# Altium PCB board.PcbDoc
Units mm, origin at the board's own origin, x right, y up, seen from the top; angles counter-clockwise.
Board outline 162 x 60 mm, 2 copper layers (Top Layer, Bottom Layer); 141 components, 80 nets, 396 pads, 0 vias.
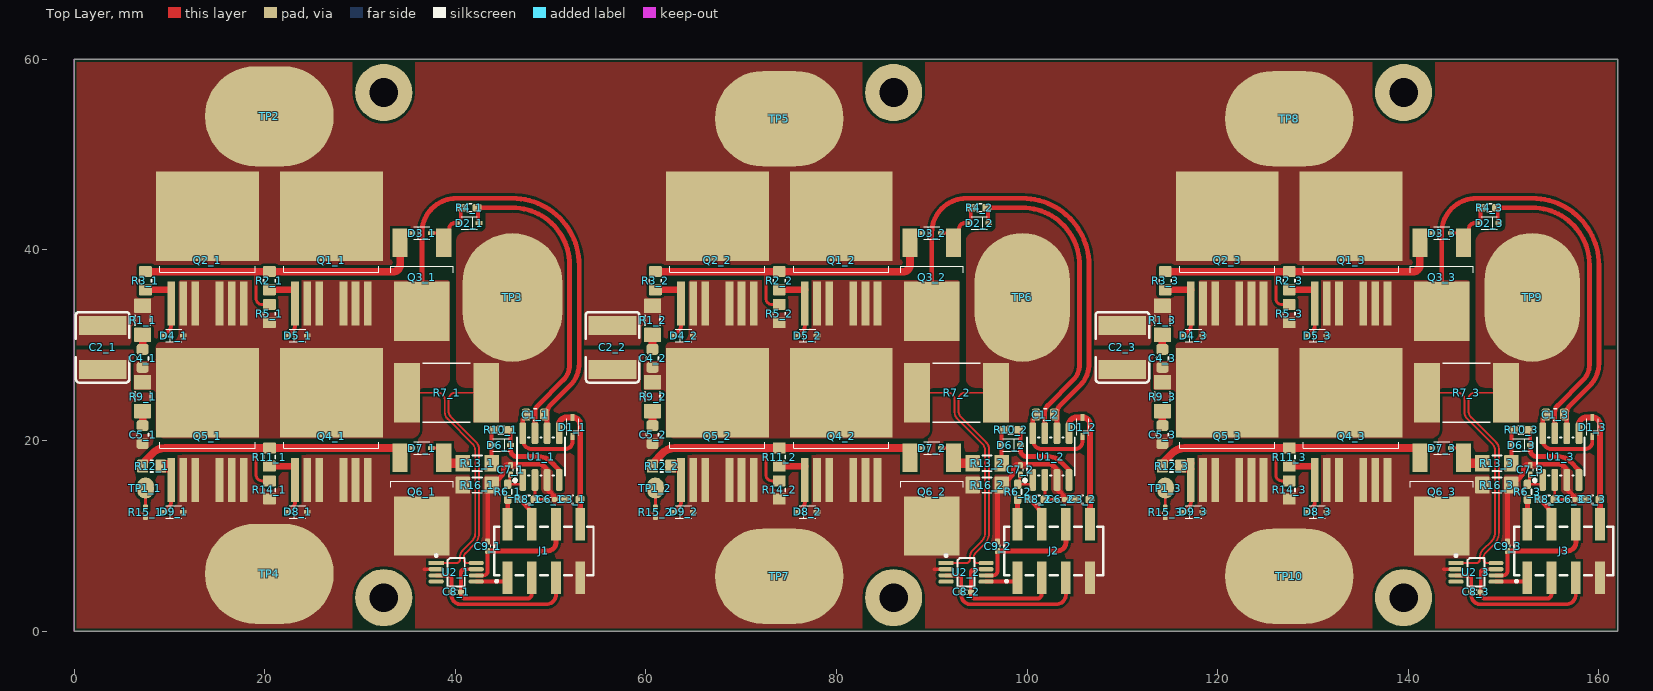
[diagram p0: Top Layer view]
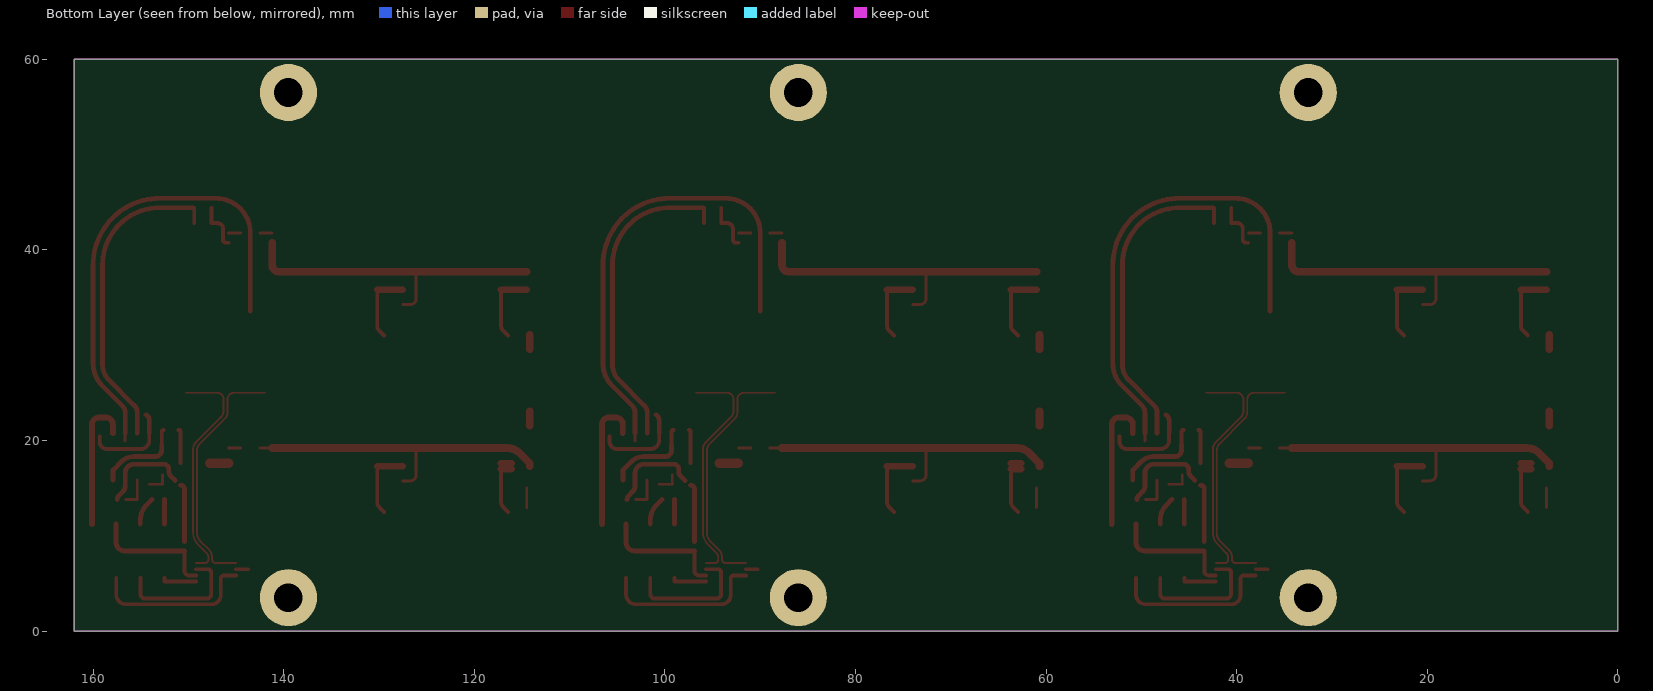
[diagram p1: Bottom Layer view, seen from below]
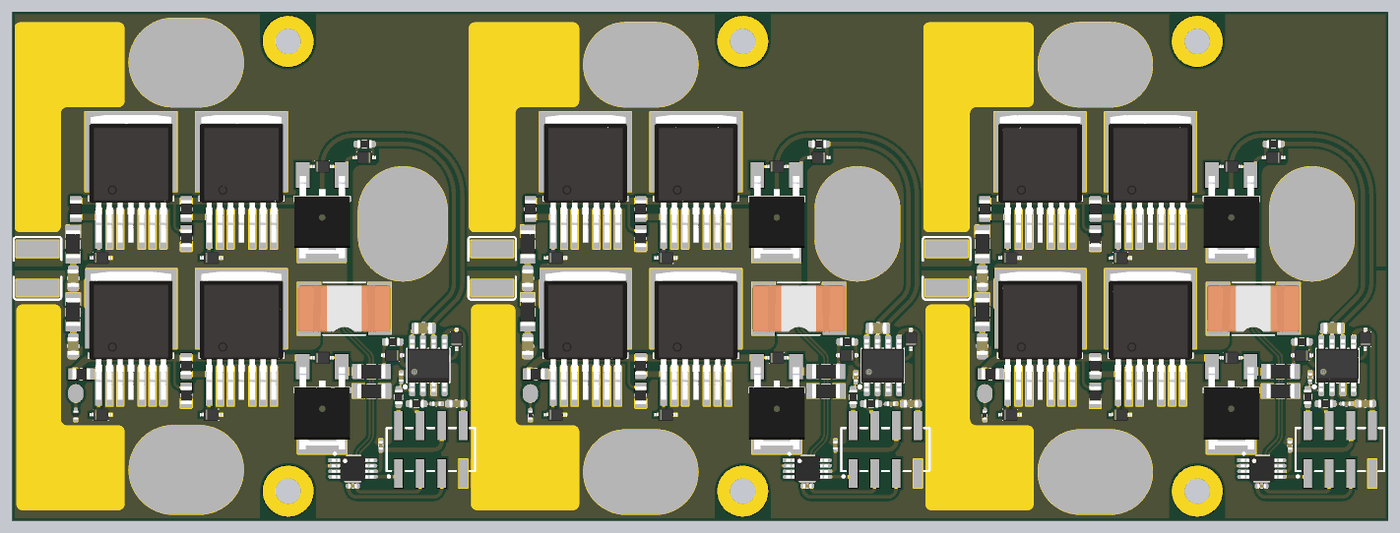
[diagram p2: 3D render of the assembled board from above, using the file's embedded part models]

## Layer stack, top to bottom
Top Solder: solder mask 0.0102, Solder Resist, Dk 3.5
Top Layer: signal copper 0.0356
Dielectric 1: dielectric 0.32, FR-4, Dk 4.8
Bottom Layer: signal copper 0.0356
Bottom Solder: solder mask 0.0102, Solder Resist, Dk 3.5

## Board outline
0,0 162,0 162,60 0,60

## Design rules (kind name [scope] priority, off if disabled: settings)
AcuteAngle [All] p1: minimum=6.00000000000000E+0001 checktracksonly=FALSE
Clearance [All] p1: gap=0.18 ignorepadtopadclearanceinfootprint=FALSE except(0.3: Arc-Fill Arc-Poly Arc-Region Track-Fill Track-Poly Track-Region SMDPad-Fill SMDPad-Poly SMDPad-Region THPad-Fill THPad-Poly THPad-Region Via-Fill Via-Poly Via-Region Fill-Fill Fill-Poly Fill-Region Poly-Poly Poly-Region Region-Region)
HoleSize [All] p1: absolutevalues=TRUE maxlimit=5 minlimit=1 maxpercent=80.000 minpercent=20.000
MinimumSolderMaskSliver [All] p1 off: minsoldermaskwidth=0.254
PermittedLayers [All] p1: toplayerpermitted=TRUE bottomlayerpermitted=FALSE
PlaneConnect [All] p1: planeconnectstyle=Direct reliefexpansion=0.508 reliefentries=4 reliefconductorwidth=0.254 reliefairgap=0.254
PolygonConnect [All] p1: connectstyle=Direct reliefconductorwidth=0.254 reliefentries=4 polygonreliefangle="90 Angle" airgapwidth=0.254
RoutingLayers [All] p1: top layer_v5=TRUE bottom layer_v5=FALSE
RoutingVias [All] p1: holewidth=0.711 width=1.27 viastyle="Through Hole" minholewidth=0.711 minwidth=1.27 maxholewidth=0.711 maxwidth=1.27
SilkToSolderMaskClearance [IsPad] p1 off: minsilkscreentomaskgap=0.254 clearancetoexposedcopper=TRUE
SolderMaskExpansion [All] p1: expansion=0.102 istentingtop=FALSE
UnRoutedNet [All] p1: checkbadconnections=TRUE
Width [All] p1: maxlimit=50 minlimit=0.2 preferedwidth=0.254
24 further rules are at their usual default settings.

## Classes and differential pairs
net class C2_3_Nets: GND VB
net class C2_2_Nets: GND VB
net class C1_1_Nets: NetC1_1_1 NetC1_1_2
net class R15_3_Nets: GND NetR15_3_1
net class R15_2_Nets: GND NetR15_2_1
net class R15_1_Nets: GND NetR15_1_1
net class R9_3_Nets: NetC1_3_2 NetC5_3_2
net class R9_2_Nets: NetC1_2_2 NetC5_2_2
net class R9_1_Nets: NetC1_1_2 NetC5_1_2
net class R8_3_Nets: NetC6_3_2 W_L
net class R8_2_Nets: NetC6_2_2 V_L
net class R8_1_Nets: NetC6_1_2 U_L
net class R1_3_Nets: NetC4_3_2 VB
net class R1_2_Nets: NetC4_2_2 VB
net class R1_1_Nets: NetC4_1_2 VB
net class C7_3_Nets: GND NetC7_3_2
net class C7_2_Nets: GND NetC7_2_2
net class C7_1_Nets: GND NetC7_1_2
net class C6_3_Nets: GND NetC6_3_2
net class C6_2_Nets: GND NetC6_2_2
net class C6_1_Nets: GND NetC6_1_2
net class TP5_Nets: VB
net class TP2_Nets: VB
net class TP1_3_Nets: NetR15_3_1
net class TP1_2_Nets: NetR15_2_1
net class TP1_1_Nets: NetR15_1_1
net class R16_3_Nets: GND
net class R16_2_Nets: GND
net class R16_1_Nets: GND
net class C9_3_Nets: GND W_5V
net class C9_2_Nets: GND V_5V
net class C9_1_Nets: GND U_5V
net class C5_3_Nets: GND NetC5_3_2
net class C5_2_Nets: GND NetC5_2_2
net class C5_1_Nets: GND NetC5_1_2
net class C2_1_Nets: GND VB
net class C1_2_Nets: NetC1_2_1 NetC1_2_2
net class C1_3_Nets: NetC1_3_1 NetC1_3_2
net class J3_Nets: GND NetJ3_1 NetJ3_2 NetJ3_3 NetJ3_4 NetJ3_5 NetJ3_6 NetJ3_7 NetJ3_8 W_5V W_H W_Iout W_L W_ref_+ W_ref_- W_Vcc
net class J2_Nets: GND NetJ2_1 NetJ2_2 NetJ2_3 NetJ2_4 NetJ2_5 NetJ2_6 NetJ2_7 NetJ2_8 V_5V V_H V_Iout V_L V_ref_+ V_ref_- V_Vcc
net class J1_Nets: GND NetJ1_1 NetJ1_2 NetJ1_3 NetJ1_4 NetJ1_5 NetJ1_6 NetJ1_7 NetJ1_8 U_5V U_H U_Iout U_L U_ref_+ U_ref_- U_Vcc
net class R14_2_Nets: GND NetD7_2_2
net class Q4_1_Nets: GND NetC1_1_2 NetD8_1_2
net class D6_1_Nets: NetD6_1_1 NetD6_1_2
net class Q5_3_Nets: GND NetC1_3_2 NetD9_3_2
net class Q5_2_Nets: GND NetC1_2_2 NetD9_2_2
net class D7_3_Nets: NetD7_3_1 NetD7_3_2
net class D7_2_Nets: NetD7_2_1 NetD7_2_2
net class TP10_Nets: GND
net class TP7_Nets: GND
net class TP9_Nets: W_OUT
net class TP8_Nets: VB
net class TP6_Nets: V_OUT
net class TP3_Nets: U_OUT
net class U2_3_Nets: GND NetC1_3_2 W_5V W_Iout W_OUT W_ref_+ W_ref_-
net class U2_2_Nets: GND NetC1_2_2 V_5V V_Iout V_OUT V_ref_+ V_ref_-
net class U2_1_Nets: GND NetC1_1_2 U_5V U_Iout U_OUT U_ref_+ U_ref_-
net class U1_3_Nets: GND NetC1_3_1 NetC1_3_2 NetC6_3_2 NetC7_3_2 NetD2_3_2 NetD6_3_2 W_Vcc
net class U1_2_Nets: GND NetC1_2_1 NetC1_2_2 NetC6_2_2 NetC7_2_2 NetD2_2_2 NetD6_2_2 V_Vcc
net class U1_1_Nets: GND NetC1_1_1 NetC1_1_2 NetC6_1_2 NetC7_1_2 NetD2_1_2 NetD6_1_2 U_Vcc
net class TP4_Nets: GND NetR12_1
net class R13_3_Nets: NetD6_3_1 NetD7_3_1
net class R13_2_Nets: NetD6_2_1 NetD7_2_1
net class R13_1_Nets: NetD6_1_1 NetD7_1_1
net class R12_3_Nets: NetD7_3_2 NetD9_3_2
net class R12_2_Nets: NetD7_2_2 NetD9_2_2
net class R12_1_Nets: NetD7_1_2 NetD9_1_2
net class R11_3_Nets: NetD7_3_2 NetD8_3_2
net class R11_2_Nets: NetD7_2_2 NetD8_2_2
net class R11_1_Nets: NetD7_1_2 NetD8_1_2
net class R10_3_Nets: NetD6_3_1 NetD6_3_2
net class R10_2_Nets: NetD6_2_1 NetD6_2_2
net class R10_1_Nets: NetD6_1_1 NetD6_1_2
net class R7_3_Nets: NetC1_3_2 W_OUT
net class R7_2_Nets: NetC1_2_2 V_OUT
net class R7_1_Nets: NetC1_1_2 U_OUT
net class R6_3_Nets: NetC7_3_2 W_H
net class R6_2_Nets: NetC7_2_2 V_H
net class R6_1_Nets: NetC7_1_2 U_H
net class R5_3_Nets: NetC1_3_2 NetD3_3_2
net class R5_2_Nets: NetC1_2_2 NetD3_2_2
net class R5_1_Nets: NetC1_1_2 NetD3_1_2
net class R4_3_Nets: NetD2_3_1 NetD2_3_2
net class R4_2_Nets: NetD2_2_1 NetD2_2_2
net class R4_1_Nets: NetD2_1_1 NetD2_1_2
net class R3_3_Nets: NetD3_3_2 NetD4_3_2
net class R3_2_Nets: NetD3_2_2 NetD4_2_2
net class R3_1_Nets: NetD3_1_2 NetD4_1_2
net class R2_3_Nets: NetD3_3_2 NetD5_3_2
net class R2_2_Nets: NetD3_2_2 NetD5_2_2
net class R2_1_Nets: NetD3_1_2 NetD5_1_2
net class Q6_3_Nets: GND NetD7_3_1 NetD7_3_2
net class Q6_2_Nets: GND NetD7_2_1 NetD7_2_2
net class Q6_1_Nets: GND NetD7_1_1 NetD7_1_2
net class Q4_3_Nets: GND NetC1_3_2 NetD8_3_2
net class Q4_2_Nets: GND NetC1_2_2 NetD8_2_2
net class Q5_1_Nets: GND NetC1_1_2 NetD9_1_2
net class Q3_3_Nets: NetC1_3_2 NetD2_3_1 NetD3_3_2
net class Q3_2_Nets: NetC1_2_2 NetD2_2_1 NetD3_2_2
net class Q3_1_Nets: NetC1_1_2 NetD2_1_1 NetD3_1_2
net class Q2_3_Nets: NetC1_3_2 NetD4_3_2 VB
net class Q2_2_Nets: NetC1_2_2 NetD4_2_2 VB
net class Q2_1_Nets: NetC1_1_2 NetD4_1_2 VB
net class Q1_3_Nets: NetC1_3_2 NetD5_3_2 VB
net class Q1_2_Nets: NetC1_2_2 NetD5_2_2 VB
net class Q1_1_Nets: NetC1_1_2 NetD5_1_2 VB
net class D9_3_Nets: GND NetD9_3_2
net class D9_2_Nets: GND NetD9_2_2
net class R14_1_Nets: GND NetD7_1_2
net class D8_3_Nets: GND NetD8_3_2
net class D8_1_Nets: GND NetD8_1_2
net class R14_3_Nets: GND NetD7_3_2
net class D8_2_Nets: GND NetD8_2_2
net class D9_1_Nets: GND NetD9_1_2
net class D6_3_Nets: NetD6_3_1 NetD6_3_2
net class D6_2_Nets: NetD6_2_1 NetD6_2_2
net class D7_1_Nets: NetD7_1_1 NetD7_1_2
net class D5_3_Nets: NetC1_3_2 NetD5_3_2
net class D5_2_Nets: NetC1_2_2 NetD5_2_2
net class D5_1_Nets: NetC1_1_2 NetD5_1_2
net class D4_3_Nets: NetC1_3_2 NetD4_3_2
net class D4_2_Nets: NetC1_2_2 NetD4_2_2
net class D4_1_Nets: NetC1_1_2 NetD4_1_2
net class D3_3_Nets: NetD2_3_1 NetD3_3_2
net class D3_2_Nets: NetD2_2_1 NetD3_2_2
net class D3_1_Nets: NetD2_1_1 NetD3_1_2
net class D2_3_Nets: NetD2_3_1 NetD2_3_2
net class D2_2_Nets: NetD2_2_1 NetD2_2_2
net class D2_1_Nets: NetD2_1_1 NetD2_1_2
net class D1_3_Nets: NetC1_3_1 W_Vcc
net class D1_2_Nets: NetC1_2_1 V_Vcc
net class D1_1_Nets: NetC1_1_1 U_Vcc
net class C8_3_Nets: W_ref_+ W_ref_-
net class C8_2_Nets: V_ref_+ V_ref_-
net class C8_1_Nets: U_ref_+ U_ref_-
net class C4_3_Nets: NetC1_3_2 NetC4_3_2
net class C4_2_Nets: NetC1_2_2 NetC4_2_2
net class C4_1_Nets: NetC1_1_2 NetC4_1_2
net class C3_3_Nets: GND W_Vcc
net class C3_2_Nets: GND V_Vcc
net class C3_1_Nets: GND U_Vcc
channel class power_phase: "Phase U" "Phase V" "Phase W"

## Components (designator, comment, footprint, x,y, rotation, side; value= is the part's Value field where it differs from the comment)
C1_1 "0.1uF" C0805_L 48.4,22.7 r0 top (schematic designator C1)
C1_2 "0.1uF" C0805_L 101.9,22.7 r0 top (schematic designator C1)
C1_3 "0.1uF" C0805_L 155.4,22.7 r0 top (schematic designator C1)
C2_1 "10uF" C2220 3,29.75 r90 top (schematic designator C2)
C2_2 "10uF" C2220 56.5,29.75 r90 top (schematic designator C2)
C2_3 "10uF" C2220 110,29.75 r90 top (schematic designator C2)
C3_1 "0.1uF" C0603 52.3,13.8 r0 top (schematic designator C3)
C3_2 "0.1uF" C0603 105.8,13.8 r0 top (schematic designator C3)
C3_3 "0.1uF" C0603 159.3,13.8 r0 top (schematic designator C3)
C4_1 "33nF" C0805 7.2,28.6 r90 top (schematic designator C4)
C4_2 "33nF" C0805 60.7,28.6 r90 top (schematic designator C4)
C4_3 "33nF" C0805 114.2,28.6 r90 top (schematic designator C4)
C5_1 "33nF" C0805 7.2,20.6 r90 top (schematic designator C5)
C5_2 "33nF" C0805 60.7,20.6 r90 top (schematic designator C5)
C5_3 "33nF" C0805 114.2,20.6 r90 top (schematic designator C5)
C6_1 "100pF" C0402 49.965,13.8 r180 top (schematic designator C6)
C6_2 "100pF" C0402 103.465,13.8 r180 top (schematic designator C6)
C6_3 "100pF" C0402 157.065,13.8 r180 top (schematic designator C6)
C7_1 "100pF" C0402 45.8,16.9 r270 top (schematic designator C7)
C7_2 "100pF" C0402 99.3,16.9 r270 top (schematic designator C7)
C7_3 "100pF" C0402 152.8,16.9 r270 top (schematic designator C7)
C8_1 "0.1uF" C0402 40.1,4.1 r0 top (schematic designator C8)
C8_2 "0.1uF" C0402 93.6,4.1 r0 top (schematic designator C8)
C8_3 "0.1uF" C0402 147.1,4.1 r0 top (schematic designator C8)
C9_1 "0.1uF" C0402 43.4,8.9 r270 top (schematic designator C9)
C9_2 "0.1uF" C0402 96.9,8.9 r270 top (schematic designator C9)
C9_3 "0.1uF" C0402 150.41,8.9 r270 top (schematic designator C9)
D1_1 "" SOD-323 52.3,21.4 r90 top (schematic designator D1)
D1_2 "" SOD-323 105.8,21.4 r90 top (schematic designator D1)
D1_3 "" SOD-323 159.3,21.4 r90 top (schematic designator D1)
D2_1 "B0530WS" SOD-323 41.486,42.8 r180 top (schematic designator D2)
D2_2 "B0530WS" SOD-323 94.986,42.8 r180 top (schematic designator D2)
D2_3 "B0530WS" SOD-323 148.486,42.8 r180 top (schematic designator D2)
D3_1 "B0530WS" SOD-323 36.5,41.75 r0 top (schematic designator D3)
D3_2 "B0530WS" SOD-323 90,41.75 r0 top (schematic designator D3)
D3_3 "B0530WS" SOD-323 143.5,41.75 r0 top (schematic designator D3)
D4_1 "B0530WS" SOD-323 10.46,31 r0 top (schematic designator D4)
D4_2 "B0530WS" SOD-323 63.96,31 r0 top (schematic designator D4)
D4_3 "B0530WS" SOD-323 117.46,31 r0 top (schematic designator D4)
D5_1 "B0530WS" SOD-323 23.46,31 r0 top (schematic designator D5)
D5_2 "B0530WS" SOD-323 76.96,31 r0 top (schematic designator D5)
D5_3 "B0530WS" SOD-323 130.46,31 r0 top (schematic designator D5)
D6_1 "B0530WS" SOD-323 44.8,19.5 r180 top (schematic designator D6)
D6_2 "B0530WS" SOD-323 98.3,19.5 r180 top (schematic designator D6)
D6_3 "B0530WS" SOD-323 151.824,19.5 r180 top (schematic designator D6)
D7_1 "B0530WS" SOD-323 36.5,19.2 r0 top (schematic designator D7)
D7_2 "B0530WS" SOD-323 90,19.2 r0 top (schematic designator D7)
D7_3 "B0530WS" SOD-323 143.5,19.2 r0 top (schematic designator D7)
D8_1 "B0530WS" SOD-323 23.46,12.5 r0 top (schematic designator D8)
D8_2 "B0530WS" SOD-323 76.96,12.5 r0 top (schematic designator D8)
D8_3 "B0530WS" SOD-323 130.46,12.5 r0 top (schematic designator D8)
D9_1 "B0530WS" SOD-323 10.46,12.5 r0 top (schematic designator D9)
D9_2 "B0530WS" SOD-323 63.96,12.5 r0 top (schematic designator D9)
D9_3 "B0530WS" SOD-323 117.46,12.5 r0 top (schematic designator D9)
J1 "2x4" HDR-SMD_8P-P2.54-V-M-R2-C4-LS8.0 49.3,8.4 r0 top
J2 "2x4" HDR-SMD_8P-P2.54-V-M-R2-C4-LS8.0 102.8,8.4 r0 top
J3 "2x4" HDR-SMD_8P-P2.54-V-M-R2-C4-LS8.0 156.3,8.4 r0 top
Q1_1 "IPB036N12N3" TO-263-7 27,43.5 r0 top (schematic designator Q1)
Q1_2 "IPB036N12N3" TO-263-7 80.5,43.5 r0 top (schematic designator Q1)
Q1_3 "IPB036N12N3" TO-263-7 134,43.5 r0 top (schematic designator Q1)
Q2_1 "IPB036N12N3" TO-263-7 14,43.5 r0 top (schematic designator Q2)
Q2_2 "IPB036N12N3" TO-263-7 67.5,43.5 r0 top (schematic designator Q2)
Q2_3 "IPB036N12N3" TO-263-7 121,43.5 r0 top (schematic designator Q2)
Q3_1 "MJD45H11" TO-252AA 36.5,33.55 r180 top (schematic designator Q3)
Q3_2 "MJD45H11" TO-252AA 90,33.55 r180 top (schematic designator Q3)
Q3_3 "MJD45H11" TO-252AA 143.5,33.55 r180 top (schematic designator Q3)
Q4_1 "IPB036N12N3" TO-263-7 27,25 r0 top (schematic designator Q4)
Q4_2 "IPB036N12N3" TO-263-7 80.5,25 r0 top (schematic designator Q4)
Q4_3 "IPB036N12N3" TO-263-7 134,25 r0 top (schematic designator Q4)
Q5_1 "IPB036N12N3" TO-263-7 14,25 r0 top (schematic designator Q5)
Q5_2 "IPB036N12N3" TO-263-7 67.5,25 r0 top (schematic designator Q5)
Q5_3 "IPB036N12N3" TO-263-7 121,25 r0 top (schematic designator Q5)
Q6_1 "MJD45H11" TO-252AA 36.5,11 r180 top (schematic designator Q6)
Q6_2 "MJD45H11" TO-252AA 90,11 r180 top (schematic designator Q6)
Q6_3 "MJD45H11" TO-252AA 143.5,11 r180 top (schematic designator Q6)
R1_1 "1" R1206 7.2,32.6 r90 top (schematic designator R1)
R1_2 "1" R1206 60.7,32.6 r90 top (schematic designator R1)
R1_3 "1" R1206 114.2,32.6 r90 top (schematic designator R1)
R2_1 "8.2" R0805 20.5,36.748 r270 top (schematic designator R2)
R2_2 "8.2" R0805 74,36.748 r270 top (schematic designator R2)
R2_3 "8.2" R0805 127.5,36.748 r270 top (schematic designator R2)
R3_1 "8.2" R0805 7.5,36.748 r270 top (schematic designator R3)
R3_2 "8.2" R0805 61,36.748 r270 top (schematic designator R3)
R3_3 "8.2" R0805 114.5,36.748 r270 top (schematic designator R3)
R4_1 "24" R0603 41.486,44.412 r0 top (schematic designator R4)
R4_2 "24" R0603 94.986,44.412 r0 top (schematic designator R4)
R4_3 "24" R0603 148.486,44.412 r0 top (schematic designator R4)
R5_1 "100k" R0805 20.5,33.3 r270 top (schematic designator R5)
R5_2 "100k" R0805 74,33.3 r270 top (schematic designator R5)
R5_3 "100k" R0805 127.5,33.3 r270 top (schematic designator R5)
R6_1 "2k" R0603 45.5,14.6 r270 top (schematic designator R6)
R6_2 "2k" R0603 99,14.6 r270 top (schematic designator R6)
R6_3 "2k" R0603 152.5,14.6 r270 top (schematic designator R6)
R7_1 "1mR" RES_CSS2H-3920R 39.1,25 r0 top (schematic designator R7)
R7_2 "1mR" RES_CSS2H-3920R 92.6,25 r0 top (schematic designator R7)
R7_3 "1mR" RES_CSS2H-3920R 146.1,25 r0 top (schematic designator R7)
R8_1 "2k" R0603 47.6,13.8 r180 top (schematic designator R8)
R8_2 "2k" R0603 101.1,13.8 r180 top (schematic designator R8)
R8_3 "2k" R0603 154.61,13.8 r180 top (schematic designator R8)
R9_1 "1" R1206 7.2,24.6 r90 top (schematic designator R9)
R9_2 "1" R1206 60.7,24.6 r90 top (schematic designator R9)
R9_3 "1" R1206 114.2,24.6 r90 top (schematic designator R9)
R10_1 "24" R0603 44.8,21.1 r0 top (schematic designator R10)
R10_2 "24" R0603 98.3,21.1 r0 top (schematic designator R10)
R10_3 "24" R0603 151.823,21.1 r0 top (schematic designator R10)
R11_1 "8.2" R0805 20.5,18.247 r270 top (schematic designator R11)
R11_2 "8.2" R0805 74,18.247 r270 top (schematic designator R11)
R11_3 "8.2" R0805 127.5,18.247 r270 top (schematic designator R11)
R12_1 "8.2" R0805 8.153,17.295 r0 top (schematic designator R12)
R12_2 "8.2" R0805 61.653,17.295 r0 top (schematic designator R12)
R12_3 "8.2" R0805 115.153,17.295 r0 top (schematic designator R12)
R13_1 "0" R1206 42.3,17.6 r0 top (schematic designator R13)
R13_2 "0" R1206 95.8,17.6 r0 top (schematic designator R13)
R13_3 "0" R1206 149.3,17.6 r0 top (schematic designator R13)
R14_1 "100k" R0805 20.5,14.8 r270 top (schematic designator R14)
R14_2 "100k" R0805 74,14.8 r270 top (schematic designator R14)
R14_3 "100k" R0805 127.5,14.8 r270 top (schematic designator R14)
R15_1 "10k NTC" R0402 7.5,12.45 r270 top (schematic designator R15)
R15_2 "10k NTC" R0402 61,12.45 r270 top (schematic designator R15)
R15_3 "10k NTC" R0402 114.5,12.45 r270 top (schematic designator R15)
R16_1 "0" R1206 42.3,15.3 r0 top (schematic designator R16)
R16_2 "0" R1206 95.8,15.3 r0 top (schematic designator R16)
R16_3 "0" R1206 149.3,15.3 r0 top (schematic designator R16)
TP1_1 "" TP2030_SMD#1 7.5,15 r180 top (schematic designator TP1)
TP1_2 "" TP2030_SMD#1 61,15 r180 top (schematic designator TP1)
TP1_3 "" TP2030_SMD#2 114.4,13.1 r180 top (schematic designator TP1)
TP2 "" TP2030_SMD#3 20.5,54 r180 top
TP3 "" TP2030_SMD#4 46,35 r180 top
TP4 "" TP2030_SMD#3 20.5,6 r180 top
TP5 "" TP2030_SMD#5 74,53.75 r180 top
TP6 "" TP2030_SMD#5 99.5,35 r270 top
TP7 "" TP2030_SMD#5 74,5.75 r180 top
TP8 "" TP2030_SMD#5 127.5,53.75 r180 top
TP9 "" TP2030_SMD#6 152.6,35 r90 top
TP10 "" TP2030_SMD#5 127.5,5.75 r180 top
U1_1 "IRS2186" SO-8 49,18.3 r0 top (schematic designator U1)
U1_2 "IRS2186" SO-8 102.5,18.3 r0 top (schematic designator U1)
U1_3 "IRS2186" SO-8 156,18.3 r0 top (schematic designator U1)
U2_1 "AD8418BRMZ" MSOP8 40.1,6.159 r270 top (schematic designator U2)
U2_2 "AD8418BRMZ" MSOP8 93.6,6.159 r270 top (schematic designator U2)
U2_3 "AD8418BRMZ" MSOP8 147.1,6.159 r270 top (schematic designator U2)

## Footprints (in the part's own frame and the unit in brackets; to place one, negate y for a bottom-side part, rotate by r counter-clockwise, add the part's x,y. Pads: shape width x height; smd on the part's side, far side on the other; paste and mask are expansions set on the pad)
C0402 [mm] "Chip Capacitor Body"
  rrect50% 0.635x0.508 smd mask+0.05: 1(-0.5,0) 2(0.5,0)
  silkscreen extent -0.13,-0.25 0.13,0.25, body extent -0.52,-0.27 0.53,0.28, height 0.55
C0603 [mil] "Chip Capacitor"
  rrect50% 38x31 smd mask+1.97: 1(-31.5,0) 2(31.5,0)
  silkscreen extent -3,-17 3,17, body extent -33,-18 33,18, height 35
C0805 [mil] "Chip Capacitor"
  rrect50% 45x50 smd mask+1.97: 1(-37.5,0) 2(37.5,0)
  silkscreen extent -6,-25 6,25, body extent -41,-27 41,27, height 53
C0805_L [mm] "Chip Capacitor"
  rrect50% 0.91x1.27 smd mask+0.05: 1(-0.953,0) 2(0.953,0)
  silkscreen extent -0.15,-0.63 0.15,0.63, body extent -1.05,-0.68 1.05,0.67, height 1.35
C2220 [mm]
  rect 2x5 smd: 1(-2.3,0) 2(2.3,0)
  silkscreen extent -3.7,-2.8 3.7,2.8
HDR-SMD_8P-P2.54-V-M-R2-C4-LS8.0 [mm]
  rect 1.02x3.4 smd: 1(-3.81,-2.82) 2(-3.81,2.82) 3(-1.27,-2.82) 4(-1.27,2.82) 5(1.27,-2.82) 6(1.27,2.82) 7(3.81,-2.82) 8(3.81,2.82)
  silkscreen extent -5.21,-3.3 5.21,2.54
MSOP8 [mm] "MSOP, 8-Leads"
  rect 0.45x1.6 smd mask+0.05: 1(-0.975,-2.1)
  oval 0.45x1.6 smd mask+0.05: 2(-0.325,-2.1) 3(0.325,-2.1) 4(0.975,-2.1) 5(0.975,2.1) 6(0.325,2.1) 7(-0.325,2.1) 8(-0.975,2.1)
  silkscreen extent -1.87,-2.23 1.5,0.9, body extent -1.5,-2.46 1.5,2.46, height 1.1
R0402 [mil]
  rrect50% 25x20 smd mask+1.97: 1(-19.68,0) 2(19.69,0)
  silkscreen extent -5,-10 5,10, body extent -21,-11 21,11, height 16
R0603 [mil] "Chip Resistor; Body 1.6 x 0.8 mm (LxW typ)"
  rrect50% 38x31 smd mask+1.97: 1(-31.5,0) 2(31.5,0)
  silkscreen extent -10,-17 10,17, body extent -33,-18 33,18, height 22
R0805 [mil] "Chip Resistor; Body 1.6 x 0.8 mm (LxW typ)"
  rrect15% 45x53.15 smd: 1(-37.5,0) 2(37.5,0)
  silkscreen extent -6,-25 6,25, body extent -41,-27 41,27, height 24
R1206 [mil] "Chip Resistor"
  rrect10% 60x70 smd mask+1.97: 1(-60,0) 2(60,0)
  silkscreen extent -20,-31 20,31, body extent -65,-33 65,33, height 26
RES_CSS2H-3920R [mm]
  rect 2.7x6.2 smd: 1(-4.15,0) 2(4.15,0)
  silkscreen extent -2.5,-3.1 2.5,3.1, body extent -5.46,-2.76 5.46,2.76, height 1.98
SO-8 [mm] "SOIC, 8-Leads, Body 4.9x3.9mm, Pitch 1.27mm, IPC Low Density"
  rrect50% 0.7x2.3 smd mask+0.05: 1(-1.905,-2.45) 2(-0.635,-2.45) 3(0.635,-2.45) 4(1.905,-2.45) 5(1.905,2.45) 6(0.635,2.45) 7(-0.635,2.45) 8(-1.905,2.45)
  silkscreen extent -2.77,-2.55 2.5,2, body extent -2.5,-3.1 2.5,3.1, height 1.75
SOD-323 [mm]
  rect 0.701x0.403 smd mask+0.05: 1(1,0)
  rect 0.703x0.401 smd mask+0.05: 2(-1,0)
  silkscreen extent -0.85,-0.65 0.85,0.65, body extent -1.35,-0.72 1.35,0.72, height 1.1
TO-252AA [mm] "D-PAK"
  rect 1.6x3 smd: 1(-2.286,-7.18) 3(2.286,-7.18)
  rect 5.8x6.2 smd: 2(0,0)
  silkscreen extent -3.3,-4.7 3.28,-4.06, body extent -3.3,-7.1 3.28,2.6, height 2.3
TO-263-7 [mm]
  rect 0.8x4.6 smd: 1(-3.81,-9.15) 2(-2.54,-9.15) 3(-1.27,-9.15) 5(1.27,-9.15) 6(2.54,-9.15) 7(3.81,-9.15)
  rect 10.8x9.4 smd: 4(0,0)
  silkscreen extent -5,-5.84 5,-5.21, body extent -4.91,-10.71 4.91,4.34, height 4.22
TP2030_SMD#1 [mm] "TP30_SMD"
  oval 1.8x2.2 smd mask+0.05: 1(0,0)
TP2030_SMD#2 [mm] "TP30_SMD"
  oval 1.8x2.2 smd mask+0.05: 1(-0.1,-1.9)
TP2030_SMD#3 [mm] "TP30_SMD"
  oval 13.5x10.5 smd mask+0.05: 1(0,0)
TP2030_SMD#4 [mm] "TP30_SMD"
  oval 10.5x13.5 smd mask+0.05: 1(0,0)
TP2030_SMD#5 [mm] "TP30_SMD"
  oval 13.5x10 smd mask+0.05: 1(0,0)
TP2030_SMD#6 [mm] "TP30_SMD"
  oval 13.5x10 smd mask+0.05: 1(0,-0.4)

## Part data
C1_1 C1_2 C1_3 C3_1 C3_2 C3_3 C8_1 C8_2 C8_3 C9_1 C9_2 C9_3: library part CAP, "0.1uF 50V 0603"
C2_1 C2_2 C2_3: library part CAP, "10uF 100V 2220"
C4_1 C4_2 C4_3 C5_1 C5_2 C5_3: library part CAP, "33nF 100V 1206"
C6_1 C6_2 C6_3 C7_1 C7_2 C7_3: library part CAP, "100pF 50V 0402"
D1_1 D1_2 D1_3: library part "Diode 10TQ035_1", "100V SOD-323"
D2_1 D2_2 D2_3 D3_1 D3_2 D3_3 D4_1 D4_2 D4_3 D5_1 D5_2 D5_3 D6_1 D6_2 D6_3 D7_1 D7_2 D7_3 D8_1 D8_2 D8_3 D9_1 D9_2 D9_3: library part "Diode 10TQ035_1", "Schottky 0.5A 30V SOD-323"
J1 J2 J3: library part "Header 8", "2x4 2.54mm PH-00668"
Q1_1 Q1_2 Q1_3 Q2_1 Q2_2 Q2_3 Q4_1 Q4_2 Q4_3 Q5_1 Q5_2 Q5_3: library part NMOS-2, "IPB036N12N3GATMA1"
Q3_1 Q3_2 Q3_3 Q6_1 Q6_2 Q6_3: library part PNP, "PNP Bipolar Transistor"
R1_1 R1_2 R1_3 R9_1 R9_2 R9_3: library part Res1, "1R 5% 1206"
R2_1 R2_2 R2_3 R3_1 R3_2 R3_3 R11_1 R11_2 R11_3 R12_1 R12_2 R12_3: library part Res1, "8.2R 5% 0805"
R4_1 R4_2 R4_3 R10_1 R10_2 R10_3: library part Res1, "24R 5% 0603"
R5_1 R5_2 R5_3 R14_1 R14_2 R14_3: library part Res1, "100k 5% 0805"
R6_1 R6_2 R6_3 R8_1 R8_2 R8_3: library part Res1, "2k 5% 0603"
R7_1 R7_2 R7_3: library part Res1, "1mR 3920R"
R13_1 R13_2 R13_3 R16_1 R16_2 R16_3: library part Res1, "0 2512"
R15_1 R15_2 R15_3: library part RES, "10k NTC 3434 0402"
TP1_1 TP1_2 TP1_3 TP2 TP3 TP4 TP5 TP6 TP7 TP8 TP9 TP10: library part TP_Dup1
U1_1 U1_2 U1_3: "IR2186"
U2_1 U2_2 U2_3: "Bidirectional, Zero Drift, Current Sense Amplifier"

## Free pads (board coordinates)
  round 6 hole 3 unplated: M(32.5,3.5) M(32.5,56.5) M(86,3.5) M(86,56.5) M(139.5,3.5) M(139.5,56.5)

## Nets (pads, with @x,y where several pads share a name; then routed paths per layer and width w, separated by ;. In a path a pad name is that pad's centre, name@x,y a point inside that pad or via, vN(x,y) a via of type N, cw(c..) or ccw(c..) an arc to the next point about the centre after c; other vN are vias at no path point)
GND: C2_1.1 C2_2.1 C2_3.1 C3_1.1 C3_2.1 C3_3.1 C5_1.1 C5_2.1 C5_3.1 C6_1.1 C6_2.1 C6_3.1 C7_1.1 C7_2.1 C7_3.1 C9_1.1 C9_2.1 C9_3.1 D8_1.1 D8_2.1 D8_3.1 D9_1.1 D9_2.1 D9_3.1 J1.7 J2.7 J3.7 Q4_1.2 Q4_1.3 Q4_1.5 Q4_1.6 Q4_1.7 Q4_2.2 Q4_2.3 Q4_2.5 Q4_2.6 Q4_2.7 Q4_3.2 Q4_3.3 Q4_3.5 Q4_3.6 Q4_3.7 Q5_1.2 Q5_1.3 Q5_1.5 Q5_1.6 Q5_1.7 Q5_2.2 Q5_2.3 Q5_2.5 Q5_2.6 Q5_2.7 Q5_3.2 Q5_3.3 Q5_3.5 Q5_3.6 Q5_3.7 Q6_1.2 Q6_2.2 Q6_3.2 R14_1.2 R14_2.2 R14_3.2 R15_1.2 R15_2.2 R15_3.2 R16_1.1 R16_1.2 R16_2.1 R16_2.2 R16_3.1 R16_3.2 TP4.1 TP7.1 TP10.1 U1_1.3 U1_2.3 U1_3.3 U2_1.2 U2_2.2 U2_3.2 | length 54
  Top Layer w0.4: 36.756,6.484 U2_1.2 ; 90.256,6.484 U2_2.2 ; 143.756,6.484 U2_3.2
  Top Layer w0.5: C9_1.1 43.4,14.876 cw(c43.824,14.876) R16_1.2 ; R16_1.2@44.4,15.8 44.834,16.234 ccw(c44.313,16.754) 45.049,16.754 45.049,16.975 cw(c45.575,16.975) 45.575,17.5 48.704,17.5 cw(c48.704,16.569) U1_1.3@49.635,16.569 ; C6_1.1 ccw(c49.898,13.8) 50.299,14.201 49.851,14.649 cw(c50.372,15.17) 49.635,15.17 U1_1.3 ; C9_2.1 96.9,14.876 cw(c97.324,14.876) R16_2.2 ; R16_2.2@97.9,15.8 98.334,16.234 ccw(c97.813,16.754) 98.549,16.754 98.549,16.975 cw(c99.075,16.975) 99.075,17.5 102.204,17.5 cw(c102.204,16.569) U1_2.3@103.135,16.569 ; C6_2.1 ccw(c103.398,13.8) 103.799,14.201 103.351,14.649 cw(c103.872,15.17) 103.135,15.17 U1_2.3 ; C9_3.1@150.4,9.4 150.4,14.876 cw(c150.824,14.876) R16_3.2 ; R16_3.2@151.4,15.8 151.834,16.234 ccw(c151.313,16.754) 152.049,16.754 152.049,16.975 cw(c152.575,16.975) 152.575,17.5 155.704,17.5 cw(c155.704,16.569) U1_3.3@156.635,16.569 ; C6_3.1@157.465,13.8 ccw(c156.898,13.8) 157.299,14.201 156.851,14.649 cw(c157.372,15.17) 156.635,15.17 U1_3.3 ; U1_1.3 U1_1.3@49.635,16.569 ; U1_1.3 U1_1.3@49.635,16.569 ; U1_2.3 U1_2.3@103.135,16.569 ; U1_2.3 U1_2.3@103.135,16.569 ; U1_3.3 U1_3.3@156.635,16.569 ; U1_3.3 U1_3.3@156.635,16.569
NetC1_1_1: C1_1.1 D1_1.2 U1_1.8 | length 9.5
  Top Layer w0.4: U1_1.8 47.095,20.031 ccw(c48.026,20.031) 48.026,19.1 51.563,19.1 ccw(c51.563,19.837) 52.3,19.837 D1_1.2
  Top Layer w0.5: U1_1.8 47.095,22.086 cw(c47.806,22.086) C1_1.1
NetC1_1_2: C1_1.2 C4_1.1 D4_1.1 D5_1.1 Q1_1.2 Q1_1.3 Q1_1.5 Q1_1.6 Q1_1.7 Q2_1.2 Q2_1.3 Q2_1.5 Q2_1.6 Q2_1.7 Q3_1.2 Q4_1.4 Q5_1.4 R5_1.2 R7_1.1 R9_1.2 U1_1.6 U2_1.1 | length 106.9
  Top Layer w0.2: R7_1.1 38.189,25 cw(c38.189,24.289) 38.9,24.289 38.9,22.954 ccw(c39.891,22.954) 39.19,22.253 41.81,19.633 cw(c41.11,18.933) 42.1,18.933 42.1,10.305 cw(c40.863,10.305) 41.738,9.43 40.832,8.524 ccw(c41.633,7.723) 40.5,7.723 40.5,7.49 cw(c40.144,7.49) 40.144,7.134 U2_1.1
  Top Layer w0.3: U1_1.6@49.635,19.937 U1_1.6
  Top Layer w0.5: U1_1.6 49.635,22.925 cw(c50.626,22.925) 49.924,23.624 52.028,25.728 ccw(c49.682,28.074) 53,28.074 53,38.4 ; 36.5,41.773 cw(c40.127,41.773) 40.127,45.4 ; 36.5,41.773 cw(c40.127,41.773) 40.127,45.4 ; 36.5,41.773 Q3_1.2 36.5,41.773 ; 40.127,45.4 46,45.4 ; 40.127,45.4 46,45.4 ; 46,45.4 cw(c46,38.4) 53,38.4 ; 46,45.4 cw(c46,38.4) 53,38.4
NetC1_2_1: C1_2.1 D1_2.2 U1_2.8 | length 9.5
  Top Layer w0.4: U1_2.8 100.595,20.031 ccw(c101.526,20.031) 101.526,19.1 105.063,19.1 ccw(c105.063,19.837) 105.8,19.837 D1_2.2
  Top Layer w0.5: U1_2.8 100.595,22.086 cw(c101.306,22.086) C1_2.1
NetC1_2_2: C1_2.2 C4_2.1 D4_2.1 D5_2.1 Q1_2.2 Q1_2.3 Q1_2.5 Q1_2.6 Q1_2.7 Q2_2.2 Q2_2.3 Q2_2.5 Q2_2.6 Q2_2.7 Q3_2.2 Q4_2.4 Q5_2.4 R5_2.2 R7_2.1 R9_2.2 U1_2.6 U2_2.1 | length 106.9
  Top Layer w0.2: R7_2.1 91.689,25 cw(c91.689,24.289) 92.4,24.289 92.4,22.954 ccw(c93.391,22.954) 92.69,22.253 95.31,19.633 cw(c94.61,18.933) 95.6,18.933 95.6,10.305 cw(c94.363,10.305) 95.238,9.43 94.332,8.524 ccw(c95.133,7.723) 94,7.723 94,7.49 cw(c93.644,7.49) 93.644,7.134 U2_2.1
  Top Layer w0.3: U1_2.6@103.135,19.937 U1_2.6
  Top Layer w0.5: U1_2.6 103.135,22.925 cw(c104.126,22.925) 103.424,23.624 105.528,25.728 ccw(c103.182,28.074) 106.5,28.074 106.5,38.4 ; 90,41.773 cw(c93.627,41.773) 93.627,45.4 99.5,45.4 ; 90,41.773 cw(c93.627,41.773) 93.627,45.4 99.5,45.4 ; 90,41.773 Q3_2.2 90,41.773 ; 99.5,45.4 cw(c99.5,38.4) 106.5,38.4 ; 99.5,45.4 cw(c99.5,38.4) 106.5,38.4
NetC1_3_1: C1_3.1 D1_3.2 U1_3.8 | length 9.5
  Top Layer w0.4: U1_3.8 154.095,20.031 ccw(c155.026,20.031) 155.026,19.1 158.563,19.1 ccw(c158.563,19.837) 159.3,19.837 D1_3.2
  Top Layer w0.5: U1_3.8 154.095,22.086 cw(c154.806,22.086) C1_3.1
NetC1_3_2: C1_3.2 C4_3.1 D4_3.1 D5_3.1 Q1_3.2 Q1_3.3 Q1_3.5 Q1_3.6 Q1_3.7 Q2_3.2 Q2_3.3 Q2_3.5 Q2_3.6 Q2_3.7 Q3_3.2 Q4_3.4 Q5_3.4 R5_3.2 R7_3.1 R9_3.2 U1_3.6 U2_3.1 | length 106.9
  Top Layer w0.2: R7_3.1 145.189,25 cw(c145.189,24.289) 145.9,24.289 145.9,22.954 ccw(c146.891,22.954) 146.19,22.253 148.81,19.633 cw(c148.11,18.933) 149.1,18.933 149.1,10.305 cw(c147.863,10.305) 148.738,9.43 147.832,8.524 ccw(c148.633,7.723) 147.5,7.723 147.5,7.49 cw(c147.144,7.49) 147.144,7.134 U2_3.1
  Top Layer w0.3: U1_3.6@156.635,19.937 U1_3.6
  Top Layer w0.5: U1_3.6 156.635,22.925 cw(c157.626,22.925) 156.924,23.624 159.028,25.728 ccw(c156.682,28.074) 160,28.074 160,38.4 ; 143.5,41.773 cw(c147.127,41.773) 147.127,45.4 ; 143.5,41.773 cw(c147.127,41.773) 147.127,45.4 ; 143.5,41.773 Q3_3.2 143.5,41.773 ; 147.127,45.4 153,45.4 ; 147.127,45.4 153,45.4 ; 153,45.4 cw(c153,38.4) 160,38.4 ; 153,45.4 cw(c153,38.4) 160,38.4
NetC4_1_2: C4_1.2 R1_1.1 | length 1.5
  Top Layer w0.8: C4_1.2 R1_1.1
NetC4_2_2: C4_2.2 R1_2.1 | length 1.5
  Top Layer w0.8: C4_2.2 R1_2.1
NetC4_3_2: C4_3.2 R1_3.1 | length 1.5
  Top Layer w0.8: C4_3.2 R1_3.1
NetC5_1_2: C5_1.2 R9_1.1 | length 1.5
  Top Layer w0.8: C5_1.2 R9_1.1
NetC5_2_2: C5_2.2 R9_2.1 | length 1.5
  Top Layer w0.8: C5_2.2 R9_2.1
NetC5_3_2: C5_3.2 R9_3.1 | length 1.5
  Top Layer w0.8: C5_3.2 R9_3.1
NetC6_1_2: C6_1.2 R8_1.1 U1_1.2 | length 3.2
  Top Layer w0.3: R8_1.1@48.365,13.8 U1_1.2 ; R8_1.1 C6_1.2 C6_1.2@49.565,13.8
NetC6_2_2: C6_2.2 R8_2.1 U1_2.2 | length 3.2
  Top Layer w0.3: R8_2.1@101.865,13.8 U1_2.2 ; R8_2.1 C6_2.2 C6_2.2@103.065,13.8
NetC6_3_2: C6_3.2 R8_3.1 U1_3.2 | length 3.2
  Top Layer w0.3: R8_3.1@155.365,13.8 U1_3.2 ; R8_3.1@155.4,13.8 156.465,13.8 C6_3.2
NetC7_1_2: C7_1.2 R6_1.1 U1_1.1 | length 2.3
  Top Layer w0.3: R6_1.1@45.7,15.4 U1_1.1@47.1,15.4 ; R6_1.1@45.725,15.5 C7_1.2@45.725,16.4
NetC7_2_2: C7_2.2 R6_2.1 U1_2.1 | length 2.3
  Top Layer w0.3: R6_2.1@99.2,15.4 U1_2.1@100.6,15.4 ; R6_2.1@99.225,15.5 C7_2.2@99.225,16.4
NetC7_3_2: C7_3.2 R6_3.1 U1_3.1 | length 2.3
  Top Layer w0.3: R6_3.1@152.7,15.4 U1_3.1@154.1,15.4 ; R6_3.1@152.725,15.5 C7_3.2@152.725,16.4
NetD2_1_1: D2_1.1 D3_1.1 Q3_1.1 R4_1.1 | length 6.3
  Top Layer w0.3: D3_1.1 Q3_1.1@38.786,41.75
  Top Layer w0.4: Q3_1.1 39.014,40.73 ccw(c39.014,41.086) 39.37,41.086 39.37,42.218 cw(c39.951,42.218) 39.951,42.8 D2_1.1 ; D2_1.1@40.586,42.8 R4_1.1@40.586,44.412
NetD2_1_2: D2_1.2 R4_1.2 U1_1.7 | length 33.6
  Top Layer w0.4: D2_1.2@42.386,42.8 R4_1.2@42.386,44.412
  Top Layer w0.5: R4_1.2@42.486,44.412 46,44.412 cw(c46,38.412) 52,38.412 52,27.924 cw(c49.769,27.924) 51.346,26.346 48.655,23.655 ccw(c49.356,22.955) 48.365,22.955 U1_1.7
NetD2_2_1: D2_2.1 D3_2.1 Q3_2.1 R4_2.1 | length 6.3
  Top Layer w0.3: D3_2.1 Q3_2.1@92.286,41.75
  Top Layer w0.4: Q3_2.1 92.514,40.73 ccw(c92.514,41.086) 92.87,41.086 92.87,42.218 cw(c93.451,42.218) 93.451,42.8 D2_2.1 ; D2_2.1@94.086,42.8 R4_2.1@94.086,44.412
NetD2_2_2: D2_2.2 R4_2.2 U1_2.7 | length 33.6
  Top Layer w0.4: D2_2.2@95.886,42.8 R4_2.2@95.886,44.412
  Top Layer w0.5: R4_2.2@95.986,44.412 99.5,44.412 cw(c99.5,38.412) 105.5,38.412 105.5,27.924 cw(c103.269,27.924) 104.846,26.346 102.155,23.655 ccw(c102.856,22.955) 101.865,22.955 U1_2.7
NetD2_3_1: D2_3.1 D3_3.1 Q3_3.1 R4_3.1 | length 6.3
  Top Layer w0.3: D3_3.1 Q3_3.1@145.786,41.75
  Top Layer w0.4: Q3_3.1 146.014,40.73 ccw(c146.014,41.086) 146.37,41.086 146.37,42.218 cw(c146.951,42.218) 146.951,42.8 D2_3.1 ; D2_3.1@147.586,42.8 R4_3.1@147.586,44.412
NetD2_3_2: D2_3.2 R4_3.2 U1_3.7 | length 33.6
  Top Layer w0.4: D2_3.2@149.386,42.8 R4_3.2@149.386,44.412
  Top Layer w0.5: R4_3.2@149.486,44.412 153,44.412 cw(c153,38.412) 159,38.412 159,27.924 cw(c156.769,27.924) 158.346,26.346 155.655,23.655 ccw(c156.356,22.955) 155.365,22.955 U1_3.7
NetD3_1_2: D3_1.2 Q3_1.3 R2_1.1 R3_1.1 R5_1.1 | length 35.3
  Top Layer w0.3: 19.1,37.7 19.1,34.875 ccw(c19.722,34.875) 19.722,34.253 R5_1.1 ; Q3_1.3@34.214,41.75 D3_1.2
  Top Layer w0.8: R3_1.1 19.1,37.7 R2_1.1 33.503,37.7 ccw(c33.503,38.411) 34.214,38.411 Q3_1.3
NetD3_2_2: D3_2.2 Q3_2.3 R2_2.1 R3_2.1 R5_2.1 | length 35.3
  Top Layer w0.3: 72.6,37.7 72.6,34.875 ccw(c73.222,34.875) 73.222,34.253 R5_2.1 ; Q3_2.3@87.714,41.75 D3_2.2
  Top Layer w0.8: R3_2.1 72.6,37.7 R2_2.1 87.003,37.7 ccw(c87.003,38.411) 87.714,38.411 Q3_2.3
NetD3_3_2: D3_3.2 Q3_3.3 R2_3.1 R3_3.1 R5_3.1 | length 35.3
  Top Layer w0.3: 126.1,37.7 126.1,34.875 ccw(c126.722,34.875) 126.722,34.253 R5_3.1 ; Q3_3.3@141.214,41.75 D3_3.2
  Top Layer w0.8: R3_3.1 126.1,37.7 R2_3.1 140.503,37.7 ccw(c140.503,38.411) 141.214,38.411 Q3_3.3
NetD4_1_2: D4_1.2 Q2_1.1 R3_1.2 | length 7.8
  Top Layer w0.4: D4_1.2 9.982,31.522 ccw(c9.479,32.025) 10.19,32.025 Q2_1.1 Q2_1.1@10.19,35.795
  Top Layer w0.7: R3_1.2 Q2_1.1@10.19,35.795
NetD4_2_2: D4_2.2 Q2_2.1 R3_2.2 | length 7.8
  Top Layer w0.4: D4_2.2 63.482,31.522 ccw(c62.979,32.025) 63.69,32.025 Q2_2.1 Q2_2.1@63.69,35.795
  Top Layer w0.7: R3_2.2 Q2_2.1@63.69,35.795
NetD4_3_2: D4_3.2 Q2_3.1 R3_3.2 | length 7.8
  Top Layer w0.4: D4_3.2 116.982,31.522 ccw(c116.479,32.025) 117.19,32.025 Q2_3.1 Q2_3.1@117.19,35.795
  Top Layer w0.7: R3_3.2 Q2_3.1@117.19,35.795
NetD5_1_2: D5_1.2 Q1_1.1 R2_1.2 | length 7.8
  Top Layer w0.4: D5_1.2 22.982,31.522 ccw(c22.479,32.025) 23.19,32.025 Q1_1.1 Q1_1.1@23.19,35.795
  Top Layer w0.7: R2_1.2 Q1_1.1@23.19,35.795
NetD5_2_2: D5_2.2 Q1_2.1 R2_2.2 | length 7.8
  Top Layer w0.4: D5_2.2 76.482,31.522 ccw(c75.979,32.025) 76.69,32.025 Q1_2.1 Q1_2.1@76.69,35.795
  Top Layer w0.7: R2_2.2 Q1_2.1@76.69,35.795
NetD5_3_2: D5_3.2 Q1_3.1 R2_3.2 | length 7.8
  Top Layer w0.4: D5_3.2 129.982,31.522 ccw(c129.479,32.025) 130.19,32.025 Q1_3.1 Q1_3.1@130.19,35.795
  Top Layer w0.7: R2_3.2 Q1_3.1@130.19,35.795
NetD6_1_1: D6_1.1 R10_1.1 R13_1.2 | length 3.6
  Top Layer w0.4: R13_1.2@43.8,17.6 D6_1.1 43.8,20.901 cw(c43.999,20.901) R10_1.1@43.999,21.1
NetD6_1_2: D6_1.2 R10_1.2 U1_1.4 | length 9.3
  Top Layer w0.4: R10_1.2 cw(c45.601,20.901) 45.8,20.901 D6_1.2
  Top Layer w0.5: D6_1.2 45.8,18.978 ccw(c46.478,18.978) 46.478,18.3 48.763,18.3 cw(c48.763,16.557) 49.995,17.79 50.905,16.88 U1_1.4
NetD6_2_1: D6_2.1 R10_2.1 R13_2.2 | length 3.6
  Top Layer w0.4: R13_2.2@97.3,17.6 D6_2.1 97.3,20.901 cw(c97.499,20.901) R10_2.1@97.499,21.1
NetD6_2_2: D6_2.2 R10_2.2 U1_2.4 | length 9.3
  Top Layer w0.4: R10_2.2 cw(c99.101,20.901) 99.3,20.901 D6_2.2
  Top Layer w0.5: D6_2.2 99.3,18.978 ccw(c99.978,18.978) 99.978,18.3 102.263,18.3 cw(c102.263,16.557) 103.495,17.79 104.405,16.88 U1_2.4
NetD6_3_1: D6_3.1 R10_3.1 R13_3.2 | length 3.6
  Top Layer w0.4: R13_3.2 D6_3.1 150.824,20.901 cw(c151.023,20.901) R10_3.1
NetD6_3_2: D6_3.2 R10_3.2 U1_3.4 | length 9.3
  Top Layer w0.4: R10_3.2@152.601,21.1 cw(c152.601,20.901) 152.8,20.901 D6_3.2@152.8,19.5
  Top Layer w0.5: D6_3.2@152.8,19.5 152.8,18.978 ccw(c153.478,18.978) 153.478,18.3 155.763,18.3 cw(c155.763,16.557) 156.995,17.79 157.905,16.88 U1_3.4
NetD7_1_1: D7_1.1 Q6_1.1 R13_1.1 | length 3.3
  Top Layer w0.3: D7_1.1 Q6_1.1@38.786,19.2
  Top Layer w1: Q6_1.1@38.786,17.6 R13_1.1
NetD7_1_2: D7_1.2 Q6_1.3 R11_1.1 R12_1.1 R14_1.1 | length 33.8
  Top Layer w0.3: 19.1,19.2 19.1,16.375 ccw(c19.722,16.375) 19.722,15.753 R14_1.1 ; Q6_1.3@34.214,19.2 D7_1.2
  Top Layer w0.8: R12_1.1 7.2,17.61 8.245,18.655 cw(c9.56,17.34) 9.56,19.2 19.1,19.2 R11_1.1 Q6_1.3@34.214,19.2
NetD7_2_1: D7_2.1 Q6_2.1 R13_2.1 | length 3.3
  Top Layer w0.3: D7_2.1 Q6_2.1@92.286,19.2
  Top Layer w1: Q6_2.1@92.286,17.6 R13_2.1
NetD7_2_2: D7_2.2 Q6_2.3 R11_2.1 R12_2.1 R14_2.1 | length 33.8
  Top Layer w0.3: 72.6,19.2 72.6,16.375 ccw(c73.222,16.375) 73.222,15.753 R14_2.1 ; Q6_2.3@87.714,19.2 D7_2.2
  Top Layer w0.8: R12_2.1 60.7,17.61 61.745,18.655 cw(c63.06,17.34) 63.06,19.2 72.6,19.2 R11_2.1 Q6_2.3@87.714,19.2
NetD7_3_1: D7_3.1 Q6_3.1 R13_3.1 | length 3.3
  Top Layer w0.3: D7_3.1 Q6_3.1@145.786,19.2
  Top Layer w1: Q6_3.1@145.786,17.6 R13_3.1
NetD7_3_2: D7_3.2 Q6_3.3 R11_3.1 R12_3.1 R14_3.1 | length 33.8
  Top Layer w0.3: 126.1,19.2 126.1,16.375 ccw(c126.722,16.375) 126.722,15.753 R14_3.1 ; Q6_3.3@141.214,19.2 D7_3.2
  Top Layer w0.8: R12_3.1 114.2,17.61 115.245,18.655 cw(c116.56,17.34) 116.56,19.2 126.1,19.2 R11_3.1 Q6_3.3@141.214,19.2
NetD8_1_2: D8_1.2 Q4_1.1 R11_1.2 | length 7.8
  Top Layer w0.4: D8_1.2 22.982,13.022 ccw(c22.479,13.525) 23.19,13.525 Q4_1.1 Q4_1.1@23.19,17.295
  Top Layer w0.7: R11_1.2 Q4_1.1@23.19,17.295
NetD8_2_2: D8_2.2 Q4_2.1 R11_2.2 | length 7.8
  Top Layer w0.4: D8_2.2 76.482,13.022 ccw(c75.979,13.525) 76.69,13.525 Q4_2.1 Q4_2.1@76.69,17.295
  Top Layer w0.7: R11_2.2 Q4_2.1@76.69,17.295
NetD8_3_2: D8_3.2 Q4_3.1 R11_3.2 | length 7.8
  Top Layer w0.4: D8_3.2 129.982,13.022 ccw(c129.479,13.525) 130.19,13.525 Q4_3.1 Q4_3.1@130.19,17.295
  Top Layer w0.7: R11_3.2 Q4_3.1@130.19,17.295
NetD9_1_2: D9_1.2 Q5_1.1 R12_1.2 | length 7.2
  Top Layer w0.4: D9_1.2 9.982,13.022 ccw(c9.479,13.525) 10.19,13.525 Q5_1.1 Q5_1.1@10.19,17.295
  Top Layer w0.7: R12_1.2@9.105,16.995 Q5_1.1@10.19,16.995 ; R12_1.2@9.105,17.595 Q5_1.1@10.19,17.595
NetD9_2_2: D9_2.2 Q5_2.1 R12_2.2 | length 7.2
  Top Layer w0.4: D9_2.2 63.482,13.022 ccw(c62.979,13.525) 63.69,13.525 Q5_2.1 Q5_2.1@63.69,17.295
  Top Layer w0.7: R12_2.2@62.605,16.995 Q5_2.1@63.69,16.995 ; R12_2.2@62.605,17.595 Q5_2.1@63.69,17.595
NetD9_3_2: D9_3.2 Q5_3.1 R12_3.2 | length 7.2
  Top Layer w0.4: D9_3.2 116.982,13.022 ccw(c116.479,13.525) 117.19,13.525 Q5_3.1 Q5_3.1@117.19,17.295
  Top Layer w0.7: R12_3.2@116.105,16.995 Q5_3.1@117.19,16.995 ; R12_3.2@116.105,17.595 Q5_3.1@117.19,17.595
NetR15_1_1: R15_1.1 TP1_1.1 | length 2.1
  Top Layer w0.3: R15_1.1 TP1_1.1
NetR15_2_1: R15_2.1 TP1_2.1 | length 2.1
  Top Layer w0.3: R15_2.1 TP1_2.1
NetR15_3_1: R15_3.1 TP1_3.1 | length 2.1
  Top Layer w0.3: R15_3.1 TP1_3.1
U_5V: C9_1.2 J1.6 U2_1.6 | length 13.2
  Top Layer w0.4: U2_1.6 42.941,5.834 ccw(c42.941,6.293) 43.4,6.293 C9_1.2
  Top Layer w0.5: C9_1.2 49.678,8.4 ccw(c49.678,9.292) 50.57,9.292 J1.6
U_H: J1.2 R6_1.2 | length 2.6
  Top Layer w0.5: J1.2@45.5,11.22 R6_1.2
U_Iout: J1.1 U2_1.5 | length 3.7
  Top Layer w0.4: U2_1.5 45.49,5.184 J1.1
U_L: J1.4 R8_1.2 | length 3
  Top Layer w0.5: R8_1.2 47.356,13.244 cw(c45.73,11.617) 48.03,11.617 J1.4
U_OUT: R7_1.2 TP3.1 U2_1.8 | length 24.5
  Top Layer w0.2: 39.589,22.419 cw(c40.291,23.119) 39.3,23.119 39.3,24.289 cw(c40.011,24.289) 40.011,25 R7_1.2 ; 39.59,22.419 42.21,19.799 cw(c41.51,19.098) 42.5,19.098 42.5,10.309 cw(c40.77,10.309) 41.994,9.086 41.078,8.17 ccw(c41.508,7.74) 40.9,7.74 40.9,7.49 ccw(c41.256,7.49) 41.256,7.134 U2_1.8
U_ref_+: C8_1.2 J1.3 U2_1.7 | length 13.7
  Top Layer w0.4: U2_1.7 40.956,6.484 ccw(c40.956,6.128) 40.6,6.128 C8_1.2 40.6,3.883 ccw(c41.083,3.883) 41.083,3.4 47.547,3.4 ccw(c47.547,3.883) 48.03,3.883 J1.3
U_ref_-: C8_1.1 J1.5 U2_1.3 | length 17.4
  Top Layer w0.4: U2_1.3 39.244,5.834 cw(c39.244,5.478) 39.6,5.478 C8_1.1 39.6,3.782 ccw(c40.582,3.782) 40.582,2.8 49.545,2.8 ccw(c49.545,3.825) 50.57,3.825 J1.5
U_Vcc: C3_1.2 D1_1.1 J1.8 U1_1.5 | length 14.4
  Top Layer w0.6: U1_1.5@50.915,20.75 50.915,21.663 cw(c51.652,21.663) 51.652,22.4 52.31,22.4 52.373,22.4 cw(c52.373,21.663) 53.11,21.663 53.11,13.8 J1.8
V_5V: C9_2.2 J2.6 U2_2.6 | length 13.2
  Top Layer w0.4: U2_2.6 96.441,5.834 ccw(c96.441,6.293) 96.9,6.293 C9_2.2
  Top Layer w0.5: C9_2.2 103.178,8.4 ccw(c103.178,9.292) 104.07,9.292 J2.6
V_H: J2.2 R6_2.2 | length 2.6
  Top Layer w0.5: J2.2@99,11.22 R6_2.2
V_Iout: J2.1 U2_2.5 | length 3.7
  Top Layer w0.4: U2_2.5 98.99,5.184 J2.1
V_L: J2.4 R8_2.2 | length 3
  Top Layer w0.5: R8_2.2 100.856,13.244 cw(c99.23,11.617) 101.53,11.617 J2.4
V_OUT: R7_2.2 TP6.1 U2_2.8 | length 24.5
  Top Layer w0.2: 93.089,22.419 cw(c93.791,23.119) 92.8,23.119 92.8,24.289 cw(c93.511,24.289) 93.511,25 R7_2.2 ; 93.09,22.419 95.71,19.799 cw(c95.01,19.098) 96,19.098 96,10.309 cw(c94.27,10.309) 95.494,9.086 94.578,8.17 ccw(c95.008,7.74) 94.4,7.74 94.4,7.49 ccw(c94.756,7.49) 94.756,7.134 U2_2.8
V_ref_+: C8_2.2 J2.3 U2_2.7 | length 13.7
  Top Layer w0.4: U2_2.7 94.456,6.484 ccw(c94.456,6.128) 94.1,6.128 C8_2.2 94.1,3.883 ccw(c94.583,3.883) 94.583,3.4 101.047,3.4 ccw(c101.047,3.883) 101.53,3.883 J2.3
V_ref_-: C8_2.1 J2.5 U2_2.3 | length 17.4
  Top Layer w0.4: U2_2.3 92.744,5.834 cw(c92.744,5.478) 93.1,5.478 C8_2.1 93.1,3.782 ccw(c94.082,3.782) 94.082,2.8 103.045,2.8 ccw(c103.045,3.825) 104.07,3.825 J2.5
V_Vcc: C3_2.2 D1_2.1 J2.8 U1_2.5 | length 14.4
  Top Layer w0.6: U1_2.5@104.415,20.75 104.415,21.663 cw(c105.152,21.663) 105.152,22.4 105.81,22.4 105.873,22.4 cw(c105.873,21.663) 106.61,21.663 106.61,13.8 J2.8
VB: C2_1.2 C2_2.2 C2_3.2 Q1_1.4 Q1_2.4 Q1_3.4 Q2_1.4 Q2_2.4 Q2_3.4 R1_1.2 R1_2.2 R1_3.2 TP2.1 TP5.1 TP8.1
W_5V: C9_3.2 J3.6 U2_3.6 | length 13.2
  Top Layer w0.4: U2_3.6@149.21,5.834 149.951,5.834 ccw(c149.951,6.293) 150.41,6.293 C9_3.2
  Top Layer w0.5: C9_3.2 156.688,8.4 ccw(c156.688,9.292) 157.58,9.292 J3.6@157.58,11.22
W_H: J3.2 R6_3.2 | length 2.6
  Top Layer w0.5: J3.2@152.51,11.22 R6_3.2@152.51,13.8
W_Iout: J3.1 U2_3.5 | length 3.7
  Top Layer w0.4: U2_3.5 152.49,5.184 J3.1
W_L: J3.4 R8_3.2 | length 3
  Top Layer w0.5: R8_3.2 154.366,13.244 ; 154.366,13.244 cw(c152.74,11.617) 155.04,11.617 J3.4@155.04,11.22
W_OUT: R7_3.2 TP9.1 U2_3.8 | length 24.5
  Top Layer w0.2: 146.589,22.419 cw(c147.291,23.119) 146.3,23.119 146.3,24.289 cw(c147.011,24.289) 147.011,25 R7_3.2 ; 146.59,22.419 149.21,19.799 cw(c148.51,19.098) 149.5,19.098 149.5,10.309 cw(c147.77,10.309) 148.994,9.086 148.078,8.17 ccw(c148.508,7.74) 147.9,7.74 147.9,7.49 ccw(c148.256,7.49) 148.256,7.134 U2_3.8
W_ref_+: C8_3.2 J3.3 U2_3.7 | length 13.7
  Top Layer w0.4: U2_3.7 147.956,6.484 ccw(c147.956,6.128) 147.6,6.128 C8_3.2 147.6,3.883 ccw(c148.083,3.883) 148.083,3.4 154.547,3.4 ccw(c154.547,3.883) 155.03,3.883 J3.3
W_ref_-: C8_3.1 J3.5 U2_3.3 | length 17.4
  Top Layer w0.4: U2_3.3 146.244,5.834 cw(c146.244,5.478) 146.6,5.478 C8_3.1 146.6,3.782 ccw(c147.582,3.782) 147.582,2.8 156.545,2.8 ccw(c156.545,3.825) 157.57,3.825 J3.5
W_Vcc: C3_3.2 D1_3.1 J3.8 U1_3.5 | length 14.4
  Top Layer w0.6: U1_3.5@157.915,20.75 157.915,21.663 cw(c158.652,21.663) 158.652,22.4 159.31,22.4 159.373,22.4 cw(c159.373,21.663) 160.11,21.663 160.11,13.8 J3.8
pads on no net: U2_1.4 U2_2.4 U2_3.4

## Polygon pours and split planes (outlines as drawn)
NetC1_1_2 on Top Layer "NONET_L02_P-001" (solid, remove dead copper, pour order 1): 8.6,29.8 8.6,28.7 cw(c8.2,28.7) 8.2,28.3 6.62,28.3 ccw(c6.62,27.933) 6.254,27.933 6.254,25.446 ccw(c6.4,25.446) 6.4,25.3 8.2,25.3 cw(c8.2,24.9) 8.6,24.9 8.6,21.191 ccw(c9.591,21.191) 9.591,20.2 35.309,20.2 ccw(c35.309,21.191) 36.3,21.191 36.3,25.221 cw(c36.579,25.221) 36.579,25.5 38.443,25.5 ccw(c38.443,26.457) 39.4,26.457 39.4,36.6 ccw(c39.2,36.6) 39.2,36.8 11.2,36.8 ccw(c11.2,36.6) 11,36.6 11,31.291 cw(c10.009,31.291) 10.009,30.3 9.1,30.3 ccw(c9.1,29.8)
NetC1_2_2 on Top Layer "NONET_L02_P-001" (solid, remove dead copper, pour order 0): 62.1,29.8 62.1,28.7 cw(c61.7,28.7) 61.7,28.3 60.12,28.3 ccw(c60.12,27.933) 59.754,27.933 59.754,25.446 ccw(c59.9,25.446) 59.9,25.3 61.7,25.3 cw(c61.7,24.9) 62.1,24.9 62.1,21.191 ccw(c63.091,21.191) 63.091,20.2 88.809,20.2 ccw(c88.809,21.191) 89.8,21.191 89.8,25.221 cw(c90.079,25.221) 90.079,25.5 91.943,25.5 ccw(c91.943,26.457) 92.9,26.457 92.9,36.6 ccw(c92.7,36.6) 92.7,36.8 64.7,36.8 ccw(c64.7,36.6) 64.5,36.6 64.5,31.291 cw(c63.509,31.291) 63.509,30.3 62.6,30.3 ccw(c62.6,29.8)
GND on Top Layer "NONET_L02_P-001" (solid, remove dead copper, pour order 7): 0,0 0,29.5 162,29.5 162,0
VB on Top Layer "NONET_L02_P-001" (solid, remove dead copper, pour order 6): 0,60 0,30 162,30 162,60
NetC1_3_2 on Top Layer "NONET_L02_P-001" (solid, remove dead copper, pour order 5): 115.6,29.8 115.6,28.7 cw(c115.2,28.7) 115.2,28.3 113.62,28.3 ccw(c113.62,27.933) 113.254,27.933 113.254,25.446 ccw(c113.4,25.446) 113.4,25.3 115.2,25.3 cw(c115.2,24.9) 115.6,24.9 115.6,21.191 ccw(c116.591,21.191) 116.591,20.2 142.309,20.2 ccw(c142.309,21.191) 143.3,21.191 143.3,25.221 cw(c143.579,25.221) 143.579,25.5 145.443,25.5 ccw(c145.443,26.457) 146.4,26.457 146.4,36.6 ccw(c146.2,36.6) 146.2,36.8 118.2,36.8 ccw(c118.2,36.6) 118,36.6 118,31.291 cw(c117.009,31.291) 117.009,30.3 116.1,30.3 ccw(c116.1,29.8)
W_OUT on Top Layer "NONET_L02_P-001" (solid, remove dead copper, pour order 4): 148.688,25.512 148.091,25.512 cw(c148.091,26.503) 147.1,26.503 147.1,39.09 147.1,40.909 cw(c148.091,40.909) 148.091,41.9 149.6,41.9 ccw(c149.6,42.5) 150.2,42.5 150.2,44 cw(c150.6,44) 150.6,44.4 158.009,44.4 cw(c158.009,43.409) 159,43.409 159,21.9 148.9,21.9 148.9,23.45 148.9,25.245 ccw(c148.661,25.272) 148.688,25.512 ccw(c148.684,25.508)
V_OUT on Top Layer "NONET_L02_P-001" (solid, remove dead copper, pour order 3): 95.188,25.512 94.591,25.512 cw(c94.591,26.503) 93.6,26.503 93.6,39.09 93.6,40.909 cw(c94.591,40.909) 94.591,41.9 96.1,41.9 ccw(c96.1,42.5) 96.7,42.5 96.7,44 cw(c97.1,44) 97.1,44.4 104.509,44.4 cw(c104.509,43.409) 105.5,43.409 105.5,21.9 95.4,21.9 95.4,23.45 95.4,25.245 ccw(c95.161,25.272) 95.188,25.512 ccw(c95.184,25.508)
U_OUT on Top Layer "NONET_L02_P-001" (solid, remove dead copper, pour order 2): 41.688,25.512 41.091,25.512 cw(c41.091,26.503) 40.1,26.503 40.1,39.09 40.1,40.909 cw(c41.091,40.909) 41.091,41.9 42.6,41.9 ccw(c42.6,42.5) 43.2,42.5 43.2,44 cw(c43.6,44) 43.6,44.4 51.009,44.4 cw(c51.009,43.409) 52,43.409 52,21.9 41.9,21.9 41.9,23.45 41.9,25.245 ccw(c41.661,25.272) 41.688,25.512 ccw(c41.684,25.508)
no net on Top Solder "NONET_L02_P-001" (solid): 5.013,34 ccw(c5.013,34.737) 5.75,34.737 5.75,48.013 cw(c6.487,48.013) 6.487,48.75 12.513,48.75 ccw(c12.513,49.487) 13.25,49.487 13.25,58.013 ccw(c12.513,58.013) 12.513,58.75 0.987,58.75 ccw(c0.987,58.013) 0.25,58.013 0.25,34.737 ccw(c0.987,34.737) 0.987,34
no net on Top Solder "NONET_L02_P-001" (solid): 1.237,25.5 ccw(c1.237,24.763) 0.5,24.763 0.5,1.987 ccw(c1.237,1.987) 1.237,1.25 12.513,1.25 ccw(c12.513,1.987) 13.25,1.987 13.25,10.513 ccw(c12.513,10.513) 12.513,11.25 6.487,11.25 cw(c6.487,11.987) 5.75,11.987 5.75,24.763 ccw(c5.013,24.763) 5.013,25.5
no net on Top Solder "NONET_L02_P-001" (solid): 58.513,34 ccw(c58.513,34.737) 59.25,34.737 59.25,48.013 cw(c59.987,48.013) 59.987,48.75 66.013,48.75 ccw(c66.013,49.487) 66.75,49.487 66.75,58.013 ccw(c66.013,58.013) 66.013,58.75 54.487,58.75 ccw(c54.487,58.013) 53.75,58.013 53.75,34.737 ccw(c54.487,34.737) 54.487,34
no net on Top Solder "NONET_L02_P-001" (solid): 54.737,25.5 ccw(c54.737,24.763) 54,24.763 54,1.987 ccw(c54.737,1.987) 54.737,1.25 66.013,1.25 ccw(c66.013,1.987) 66.75,1.987 66.75,10.513 ccw(c66.013,10.513) 66.013,11.25 59.987,11.25 cw(c59.987,11.987) 59.25,11.987 59.25,24.763 ccw(c58.513,24.763) 58.513,25.5
no net on Top Solder "NONET_L02_P-001" (solid): 108.237,25.5 ccw(c108.237,24.763) 107.5,24.763 107.5,1.987 ccw(c108.237,1.987) 108.237,1.25 119.513,1.25 ccw(c119.513,1.987) 120.25,1.987 120.25,10.513 ccw(c119.513,10.513) 119.513,11.25 113.487,11.25 cw(c113.487,11.987) 112.75,11.987 112.75,24.763 ccw(c112.013,24.763) 112.013,25.5
no net on Top Solder "NONET_L02_P-001" (solid): 112.013,34 ccw(c112.013,34.737) 112.75,34.737 112.75,48.013 cw(c113.487,48.013) 113.487,48.75 119.513,48.75 ccw(c119.513,49.487) 120.25,49.487 120.25,58.013 ccw(c119.513,58.013) 119.513,58.75 107.987,58.75 ccw(c107.987,58.013) 107.25,58.013 107.25,34.737 ccw(c107.987,34.737) 107.987,34

## Keep-outs
Keep-Out Layer:
  the board outline again, w0

## Other copper
Top Layer:
  pour cut-out: 29.2,0 29.2,3.5 cw(c32.5,3.5) 32.5,6.8 32.5,0
  pour cut-out: 35.8,0 35.8,3.5 ccw(c32.5,3.5) 32.5,6.8 32.5,0
  pour cut-out: 35.8,60 35.8,56.5 cw(c32.5,56.5) 32.5,53.2 32.5,60
  pour cut-out: 29.2,60 29.2,56.5 ccw(c32.5,56.5) 32.5,53.2 32.5,60
  pour cut-out: 82.7,0 82.7,3.5 cw(c86,3.5) 86,6.8 86,0
  pour cut-out: 89.3,0 89.3,3.5 ccw(c86,3.5) 86,6.8 86,0
  pour cut-out: 89.3,60 89.3,56.5 cw(c86,56.5) 86,53.2 86,60
  pour cut-out: 82.7,60 82.7,56.5 ccw(c86,56.5) 86,53.2 86,60
  pour cut-out: 136.2,60 136.2,56.5 ccw(c139.5,56.5) 139.5,53.2 139.5,60
  pour cut-out: 142.8,60 142.8,56.5 cw(c139.5,56.5) 139.5,53.2 139.5,60
  pour cut-out: 142.8,0 142.8,3.5 ccw(c139.5,3.5) 139.5,6.8 139.5,0
  pour cut-out: 136.2,0 136.2,3.5 cw(c139.5,3.5) 139.5,6.8 139.5,0

## Dimensions
0,60 to 162,60 on Mechanical 1
0,60 to 0,0 on Mechanical 1